# Altium PCB PCB_Oxi_sesnor_VT0.1-991023.PcbDoc
Units mm, origin at the board's own origin, x right, y up, seen from the top; angles counter-clockwise.
Board outline 15.1 x 11.1 mm, 2 copper layers (Top Layer, Bottom Layer); 12 components, 17 nets, 63 pads, 19 vias.
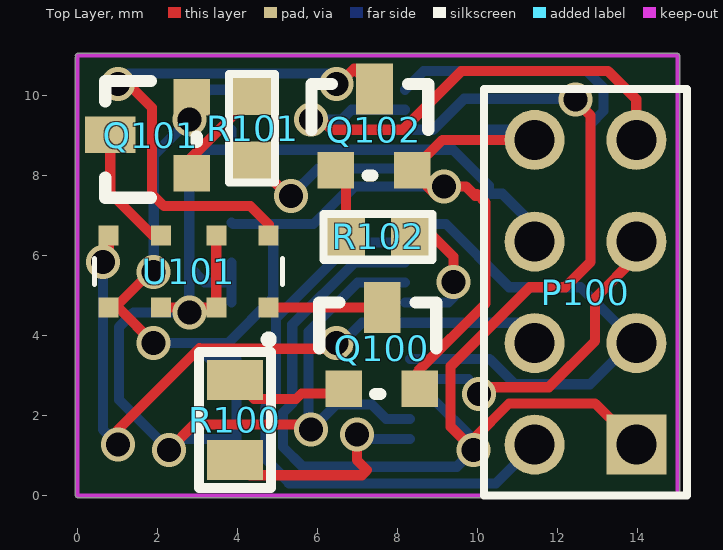
[diagram p0: Top Layer view]
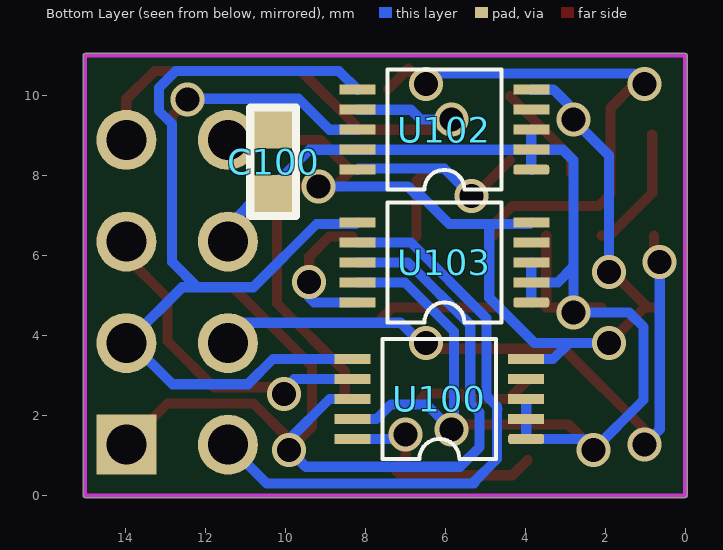
[diagram p1: Bottom Layer view, seen from below]

## Layer stack, top to bottom
Top Solder: solder mask 0.0102, Solder Resist, Dk 3.5
Top Layer: signal copper 0.0356
Dielectric 1: dielectric 0.32, FR-4, Dk 4.8
Bottom Layer: signal copper 0.0356
Bottom Solder: solder mask 0.0102, Solder Resist, Dk 3.5

## Board outline
-0.05,0 -0.05,10.95 cw(c0,10.95) -0.044,10.975 cw(c0,11) 0,11.05 15,11.05 cw(c15,11) 15.05,11 15.05,0 cw(c15,0) 15,-0.05 0,-0.05 cw(c0,0)

## Design rules (kind name [scope] priority, off if disabled: settings)
AssemblyTestPointUsage [All] p1 off:
AssemblyTestpoint [All] p1 off: testpointundercomponent=TRUE minsize=1.016 maxsize=2.54 preferedsize=1.524 minholesize=0 maxholesize=1.016 preferedholesize=0.813 testpointgrid=0.025 usegrid=TRUE gridtolerance=0 allowsidetop=TRUE allowsidebottom=TRUE
Clearance [All] p1: gap=0.152 ignorepadtopadclearanceinfootprint=FALSE
ComponentClearance "OLED Clearance" [InComponent('OLED100') vs InComponent('OLED 14')] p1: gap=-2.54 collisioncheckmode=3 verticalgap=2540 showdistances=FALSE // OLED Rev diffrences
ComponentClearance [All] p2 off: gap=0.254 collisioncheckmode=3 verticalgap=0.254 showdistances=TRUE
FabricationTestPointUsage [All] p1 off: valid=0 allowmultiple=FALSE
FabricationTestpoint [All] p1 off: side=3 testpointundercomponent=TRUE minsize=1.016 maxsize=2.54 preferedsize=1.524 minholesize=0 maxholesize=1.016 preferedholesize=0.813 testpointgrid=0.025 allowsidetop=TRUE allowsidebottom=TRUE usegrid=TRUE gridtolerance=0
HoleSize [All] p1 off: absolutevalues=TRUE maxlimit=2.54 minlimit=0.025 maxpercent=80.000 minpercent=20.000
HoleToHoleClearance [All] p1 off: gap=0.254 allowstackedmicrovias=TRUE
LayerPairs [All] p1 off: enforce=TRUE
MinimumSolderMaskSliver [All] p1 off: minsoldermaskwidth=0.254
NetAntennae [All] p1 off: netantennaetolerance=0
PolygonConnect [All] p1: connectstyle=Relief reliefconductorwidth=0.254 reliefentries=4 polygonreliefangle="90 Angle" airgapwidth=0.254
RoutingVias [All] p1: holewidth=0.711 width=1.27 viastyle="Through Hole" minholewidth=0.6 minwidth=0.85 maxholewidth=0.711 maxwidth=1.27
SilkToSilkClearance [All] p1 off: silktosilkclearance=0.254
SilkToSolderMaskClearance [IsPad] p1 off: minsilkscreentomaskgap=0.254 clearancetoexposedcopper=TRUE
SolderMaskExpansion [All] p1: expansion=0.102
Width [All] p1: maxlimit=2.54 minlimit=0.254 preferedwidth=1.27
18 further rules are at their usual default settings.

## Components (designator, comment, footprint, x,y, rotation, side; value= is the part's Value field where it differs from the comment)
C100 "100nF" 0603-2 10.287,7.544 r90 bottom
P100 "Header 4X2H" HDR2X4_edited 13.97,1.27 r90 top
Q100 "2n7002" a_SOT23 6.655,2.667 r0 top
Q101 "2n7002" a_SOT23 2.852,8.053 r90 top
Q102 "2n7002" a_SOT23 6.459,8.129 r0 top
R100 "1k" 0805-2 3.937,0.889 r90 top
R101 "1k" 0603-2 4.376,8.383 r90 top
R102 "1k" 0603-2 8.313,6.478 r180 top
U100 "AD5683RBRMZ" MSOP-10 3.973,1.414 r90 bottom
U101 "SFH_7050" XDCR_SFH_7050 2.78,5.6 r180 bottom
U102 "AD5683RBRMZ" MSOP-10 3.846,8.145 r90 bottom
U103 "AD5683RBRMZ" MSOP-10 3.846,4.827 r90 bottom

## Footprints (in the part's own frame and the unit in brackets; to place one, negate y for a bottom-side part, rotate by r counter-clockwise, add the part's x,y. Pads: shape width x height; smd on the part's side, far side on the other; paste and mask are expansions set on the pad)
0603-2 [mil]
  rect 37x40 smd: 1(0,0) 2(63,0)
  silkscreen extent -22,-22 85,23, body extent 1,-16 63,16, height 18
0805-2 [mm]
  rect 1x1.4 smd: 1(0,0) 2(2,0)
  silkscreen extent -0.7,-0.9 2.7,0.9, body extent 0,-0.58 2,0.67, height 0.5
a_SOT23 [mil]
  rect 36x36 smd: 1(0,0) 2(75,0)
  rect 36x50 smd: 3(38,80)
  silkscreen extent -24,-5 91,85, body extent -23,-4 95,96, height 39
HDR2X4_edited [mm] "Connector; Header; 4x2 Position"
  rect 1.5x1.5 hole 1: 1(0,0)
  round 1.5 hole 1: 2(0,2.54) 3(2.54,0) 4(2.54,2.54) 5(5.08,0) 6(5.08,2.54) 7(7.62,0) 8(7.62,2.54)
  silkscreen extent -1.27,-1.27 8.89,3.81, body extent -1.22,-1.19 8.76,3.89, height 9.5
MSOP-10 [mm]
  rrect50% 0.25x0.9 smd: 1(0,0)
  rect 0.25x0.9 smd: 2(0.5,0) 3(1,0) 4(1.5,0) 5(2,0) 6(2,4.34) 7(1.5,4.34) 8(1,4.34) 9(0.5,4.34) 10(0,4.34)
  silkscreen extent -0.5,0.75 2.5,3.59, body extent -0.51,-0.35 2.49,4.67, height 1.05
XDCR_SFH_7050 [mm]
  rect 0.5x0.5 smd far side paste-1 mask+0: 1(-2,-0.9) 2(-0.69,-0.9) 3(0.69,-0.9) 4(2,-0.9) 5(2,0.9) 6(0.69,0.9) 7(-0.69,0.9) 8(-2,0.9)

## Part data
C100: library part CAP, "Capacitor"
P100: "Header, 4-Pin, Dual row, Right Angle", LatestRevisionDate=17-Jul-2002, LatestRevisionNote="Re-released for DXP Platform.", Publisher="Altium Limited"
Q100 Q101 Q102: library part MOSFET-N, "N-Channel MOSFET", LatestRevisionDate=17-Jul-2002, LatestRevisionNote="Re-released for DXP Platform.", PackageDescription="TO, Flat Index; 3 In-Line, Axial Leads; Body Dia. 4.6mm; Lead Dia. 0.5 mm (max)", PackageReference=E3, PackageVersion=1995/1996, Published=8-Jun-2000, Publisher="Altium Limited"
R100 R101 R102: library part RES1
U100 U102 U103: "Tiny 16-/14-/12-Bit SPI nanoDAC+, with  ±2 (16-Bit) LSB INL and 2 ppm/°C Reference"
U101: "Salida de voltaje del sensor de ox?­metro / frecuencia card?­aca", Package=None, Digi-Key_Part_Number=475-3346-1-ND, Digi-Key_Purchase_URL=https://www.digikey.com/product-detail/en/osram-opto-semiconductors-inc/SFH-7050/475-3346-1-ND/7645273?utm_source=snapeda&utm_medium=aggregator&utm_campaign=symbol, MF="OSRAM Opto", MP="SFH 7050", SnapEDA_Link=https://www.snapeda.com/parts/SFH%207050/OSRAM%20Opto%20Semiconductors%20Inc./view-part/227176/?ref=snap

## Via types
v1: diameter 0.85, hole 0.6, Top Layer to Bottom Layer, 19 vias

## Nets (pads, with @x,y where several pads share a name; then routed paths per layer and width w, separated by ;. In a path a pad name is that pad's centre, name@x,y a point inside that pad or via, vN(x,y) a via of type N, cw(c..) or ccw(c..) an arc to the next point about the centre after c; other vN are vias at no path point)
DAC_Sync_1: P100.5 U100.7 | length 8
  Top Layer w0.254: v1(10.033,2.54) 10.199,2.706 11.782,2.706 12.941,3.865 12.941,4.94 13.97,5.969 P100.5 P100.5@13.97,6.477
  Bottom Layer w0.254: U100.7 9.772,2.914
DAC_Sync_2: P100.7 U102.7 | length 12.5
  Top Layer w0.254: v1(5.842,9.398) 6.096,9.398 6.35,9.144 8.128,9.144 9.594,10.61 13.266,10.61 13.97,9.906 P100.7@13.97,9.017
  Bottom Layer w0.254: v1(5.842,9.398) 6.604,9.398 6.851,9.645 U102.7
DAC_Sync_3: P100.2 U103.7 | length 15.7
  Bottom Layer w0.254: 5.271,0.317 5.284,0.304 10.464,0.304 P100.2@11.303,1.143 ; 5.284,0.329 4.702,0.911 4.702,2.155 4.693,2.164 4.702,2.173 4.702,2.226 4.963,2.486 4.963,4.435 6.854,6.327 U103.7 ; P100.2@11.303,1.778 P100.2@11.303,1.143 ; P100.2 P100.2@11.303,1.143
GND: C100.2 P100.8 Q100.2 Q101.2 Q102.2 U100.5 U101.4 U102.5 U103.5 | length 33.9
  Top Layer w0.254: U101.4 U101.4@0.937,4.7 ; v1(1.905,3.81) 1.015,4.7 U101.4@0.937,4.7 ; v1(1.905,5.588) 1.825,5.588 U101.4@0.937,4.7 ; Q100.2@8.509,2.413 8.509,3.104 10.204,4.799 10.204,7.322 9.988,7.538 9.943,7.493 9.707,7.729 v1(9.162,7.729) 9.162,7.675 8.98,7.493 8.364,8.109 Q102.2 9.125,8.89 P100.8
  Bottom Layer w0.254: v1(1.905,3.81) 2.906,3.81 ; v1(1.905,5.588) 1.905,8.509 v1(2.794,9.398) 2.54,9.398 3.287,10.145 U102.5 ; U103.5 3.884,6.789 4.895,6.789 ; U100.5 3.302,3.414 2.906,3.81 ; v1(9.162,7.729) 6.93,7.729 6.694,7.493 6.649,7.538 5.9,6.789 4.895,6.789 ; C100.2 11.176,9.144 P100.8 ; 2.906,3.81 3.763,3.81 4.895,4.943 4.895,6.789
LEDA_1: C100.1 P100.6 U100.1 U100.2 U100.3 U100.9 U101.2 U101.3 U101.7 U102.1 U102.2 U102.3 U102.9 U103.1 U103.2 U103.3 U103.9 | length 39.7
  Top Layer w0.254: U101.3 v1@2.794,4.7 ; v1(2.286,1.143) 2.921,1.778 5.842,1.778 v1(5.842,1.651) ; v1(2.794,4.572) v1@2.794,4.7 ; U101.7 U101.2 v1@2.794,4.7
  Bottom Layer w0.254: v1(2.286,1.143) 1.041,2.388 1.041,4.216 1.397,4.572 v1(2.794,4.572) 2.794,5.715 ; v1@2.523,1.414 U100.1 U100.2 U100.3 ; U103.1 U103.2 ; U103.3 U103.2 ; U102.1 U102.2 ; U102.3 U102.2 ; v1@5.776,1.844 5.776,4.099 7.004,5.327 U103.9 ; v1(5.842,1.651) 6.466,2.275 7.355,2.275 7.716,1.914 U100.9 ; P100.6@11.303,6.858 10.617,7.544 C100.1 10.287,7.747 9.389,8.645 U102.9 U102.2 ; 2.794,5.715 3.182,5.327 U103.2 ; 2.794,5.715 2.794,8.382 3.057,8.645 U102.2
LEDK_1: Q100.3 U101.1 | length 2.9
  Top Layer w0.254: U101.1 7.314,4.7 Q100.3@7.569,4.445
LEDK_2: Q101.3 U101.6 | length 3.2
  Top Layer w0.254: Q101.3 0.82,7.562 1.881,6.501 U101.6
LEDK_3: Q102.3 U101.8 | length 14.1
  Top Layer w0.254: v1(1.016,10.287) 1.27,10.287 1.861,9.696 1.861,7.537 2.159,7.239 4.318,7.239 4.78,6.777 U101.8 ; v1(6.477,10.287) 6.477,10.568 6.647,10.398 6.917,10.668 Q102.3
  Bottom Layer w0.254: v1(1.016,10.287) 1.28,10.551 6.34,10.551 6.477,10.414 v1(6.477,10.287)
NetQ100_1: Q100.1 R100.2 | length 3
  Top Layer w0.254: R100.2 4.413,2.413 5.464,2.413 5.6,2.549 6.468,2.549 Q100.1@6.604,2.413
NetQ101_1: Q101.1 R101.2 | length 2.6
  Top Layer w0.254: Q101.1 2.852,8.459 R101.2
NetQ102_1: Q102.1 R102.2 | length 1.8
  Top Layer w0.254: Q102.1 6.713,7.875 R102.2
NetR100_1: R100.1 U100.10 | length 5.9
  Top Layer w0.254: R100.1 4.318,0.508 7.112,0.508 7.239,0.635 6.985,0.889 v1(6.985,1.524)
  Bottom Layer w0.254: v1(6.985,1.524) 7.095,1.414 U100.10
NetR101_1: R101.1 U102.10 | length 4.5
  Top Layer w0.254: R101.1 5.266,7.493 v1(5.334,7.493)
  Bottom Layer w0.254: v1(5.334,7.493) 6.013,8.172 8.159,8.172 U102.10
NetR102_1: R102.1 U103.10 | length 3.6
  Top Layer w0.254: R102.1 8.889,6.478 9.398,5.969 v1(9.398,5.334)
  Bottom Layer w0.254: U103.10 9.272,4.827 9.398,4.953 v1(9.398,5.334)
PLEDK: P100.4 U101.5 | length 18.9
  Top Layer w0.254: v1(0.635,5.842) 0.671,5.842 0.78,5.733 U101.5 ; v1(1.016,1.27) 1.016,1.651 3.048,3.683 3.063,3.668 6.752,3.668 6.613,3.807 v1(6.48,3.807)
  Bottom Layer w0.254: v1(0.635,5.842) 0.635,1.651 v1(1.016,1.27) ; v1(6.48,3.807) 6.59,3.807 v1@6.595,3.801 ; P100.4@11.049,4.064 11.303,4.318 7.112,4.318 v1@6.595,3.801 ; v1@6.595,3.801 6.496,3.702 6.595,3.602 6.695,3.702 v1@6.595,3.801
SCK: P100.3 U100.6 U102.6 U103.6 | length 24.1
  Bottom Layer w0.254: U103.6 8.224,6.789 9.213,6.789 10.795,5.207 12.192,5.207 ; U102.6 8.651,10.61 12.738,10.61 13.15,10.198 13.15,9.614 12.827,9.291 12.827,5.842 12.192,5.207 ; U100.6 10.302,3.414 10.935,2.781 12.814,2.781 P100.3@13.906,3.873 ; P100.3 P100.3@13.906,3.873 ; 12.192,5.207 12.573,5.207 P100.3@13.906,3.873
SDI: P100.1 U100.8 U102.8 U103.8 | length 35.5
  Top Layer w0.254: v1(9.906,1.143) v1@9.906,1.27 ; v1(12.446,9.906) 12.446,10.16 12.303,10.017 12.827,9.493 12.827,5.842 12.192,5.207 11.303,5.207 9.329,3.233 9.329,1.72 9.779,1.27 v1@9.906,1.27 ; P100.1 12.941,2.299 10.789,2.299 9.906,1.417 v1@9.906,1.27
  Bottom Layer w0.254: U103.8 6.929,5.827 5.369,4.267 5.369,2.301 5.138,2.07 5.138,1.212 5.632,0.718 9.481,0.718 v1(9.906,1.143) 9.906,1.397 8.889,2.414 U100.8 ; U102.8 8.891,9.145 9.665,9.919 12.433,9.919 v1(12.446,9.906)
pads on no net: U100.4 U102.4 U103.4

## Keep-outs
Keep-Out Layer:
  lines w0.1: 0,10.95 0,0 15,0 15,11 0,11